# Altium PCB Relay_Controller_REV2.PcbDoc
Units mm, origin at the board's own origin, x right, y up, seen from the top; angles counter-clockwise.
Board outline 127.25 x 101.6 mm, 2 copper layers (Top Layer, Bottom Layer); 78 components, 52 nets, 291 pads, 93 vias.
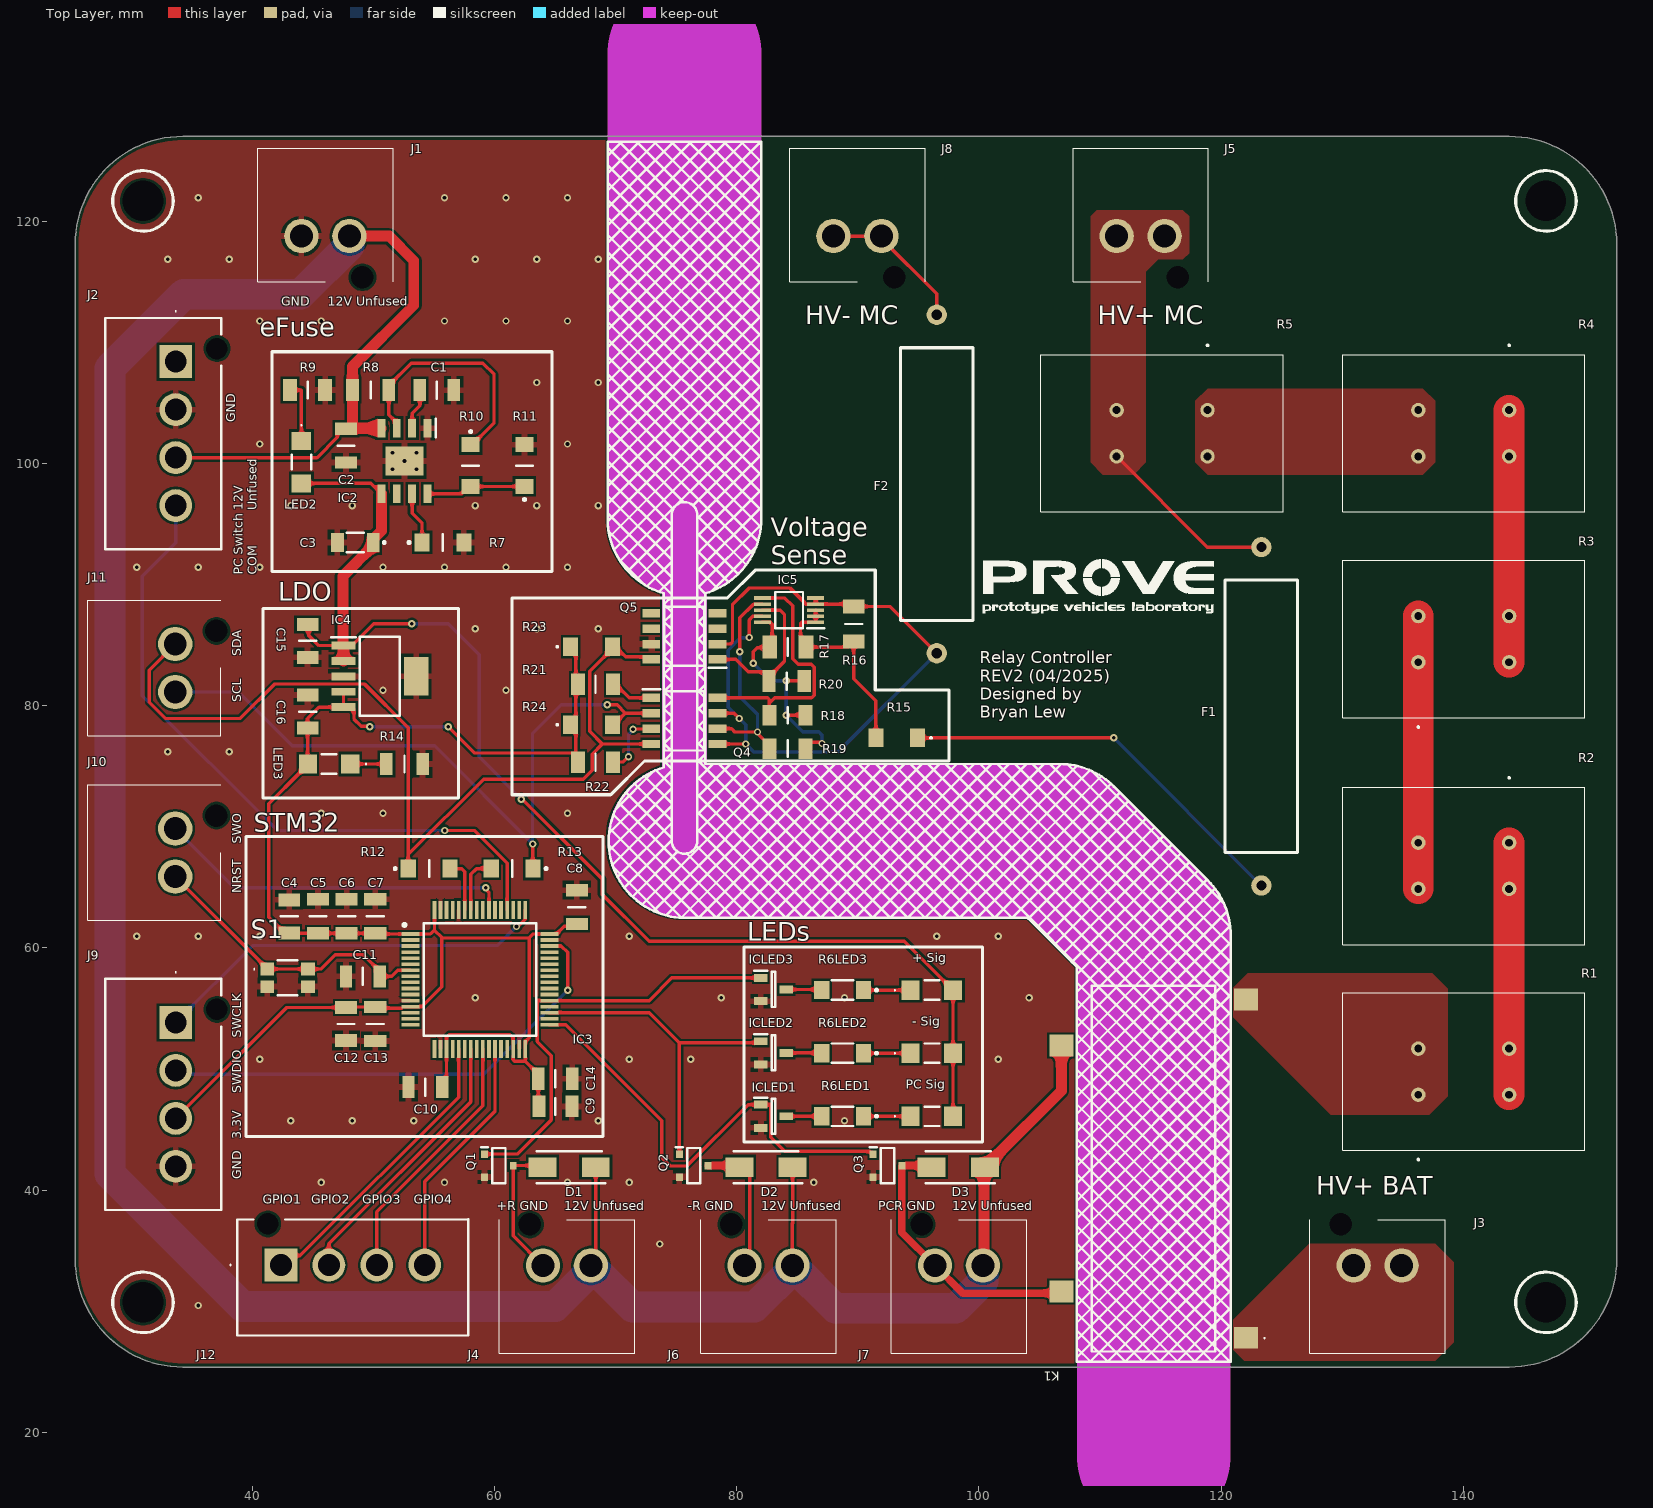
[diagram p0: Top Layer view]
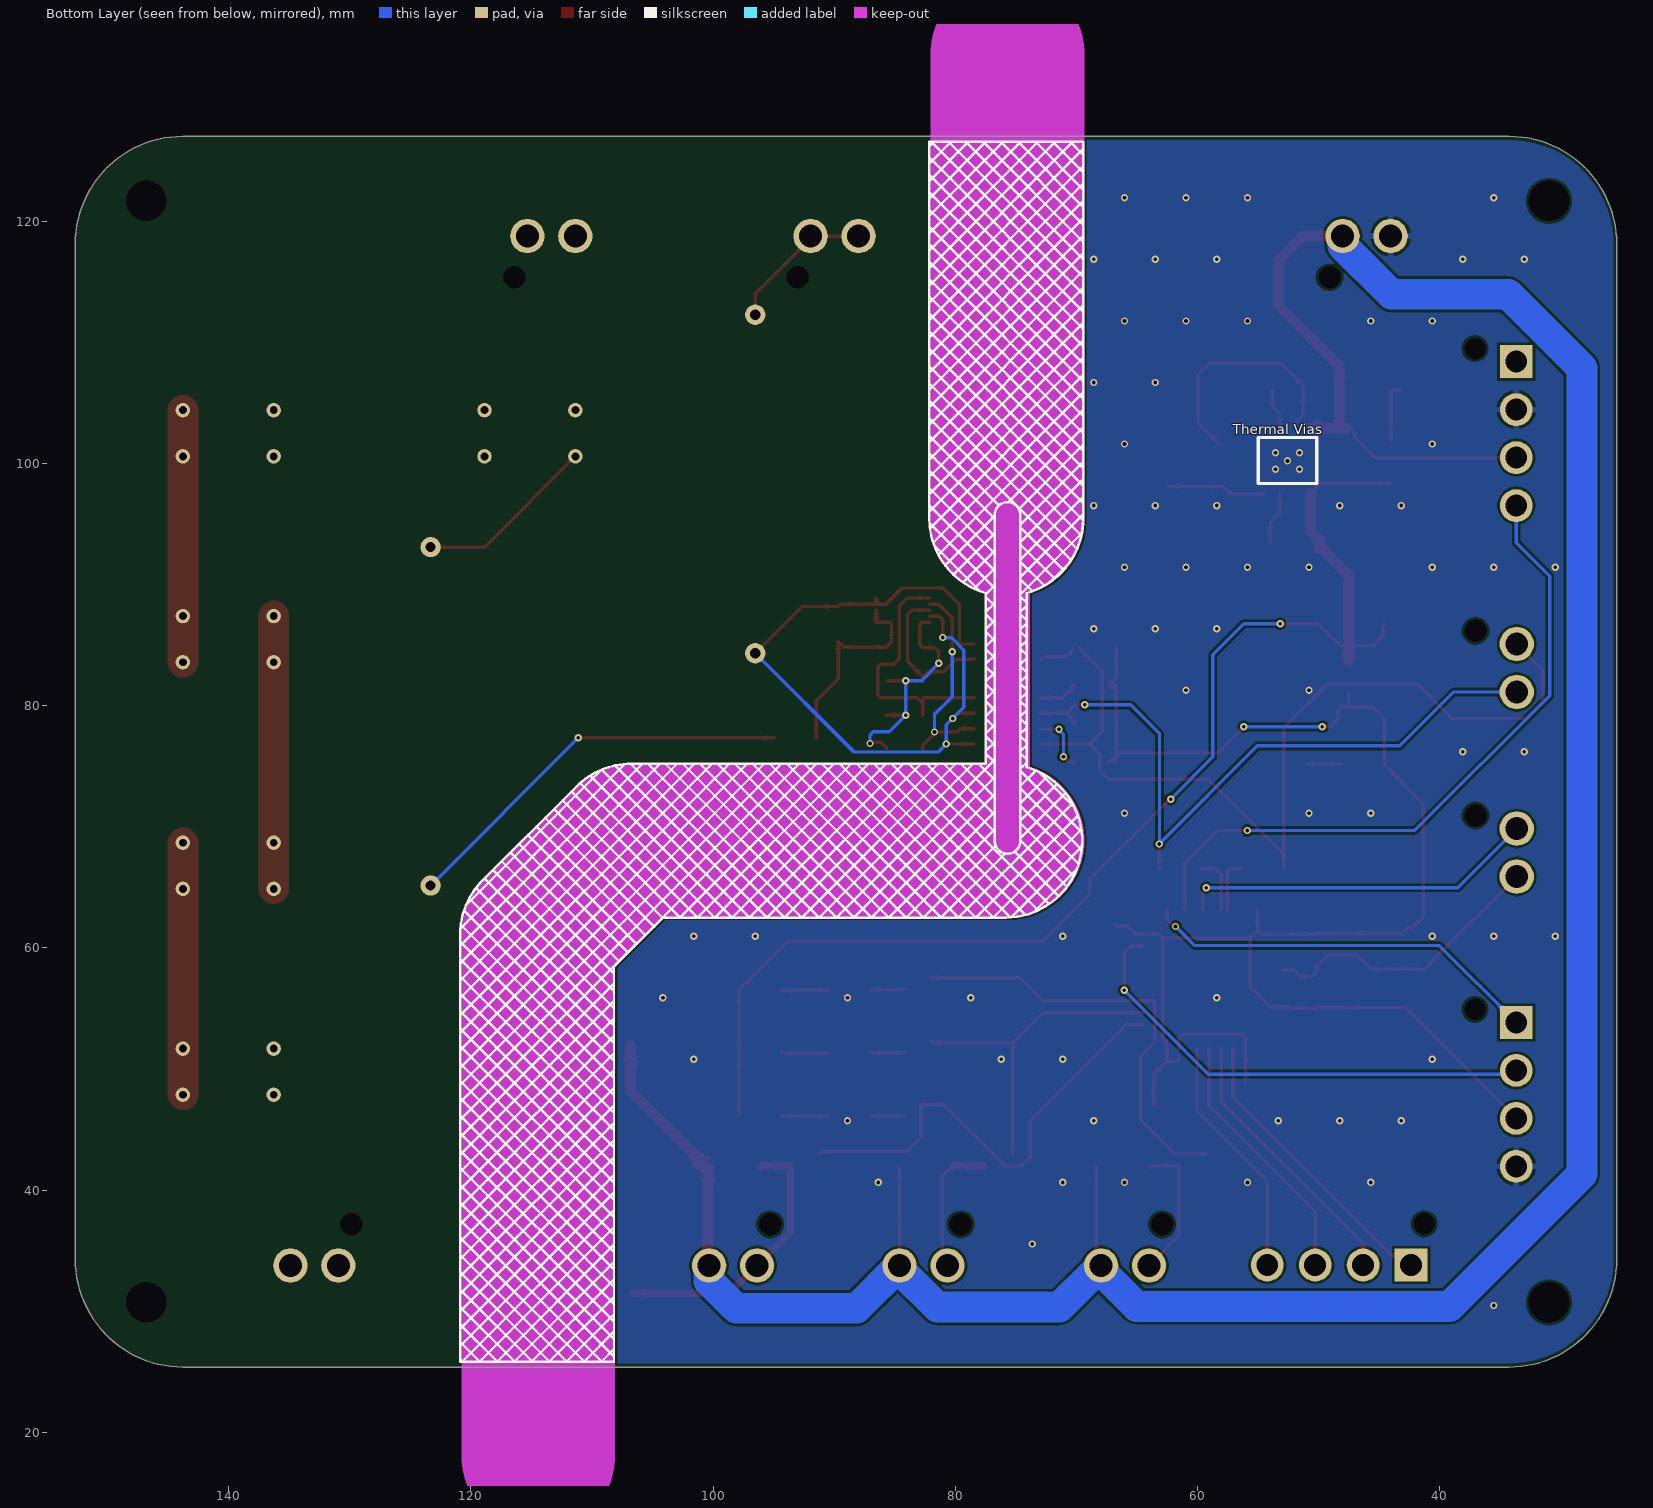
[diagram p1: Bottom Layer view, seen from below]
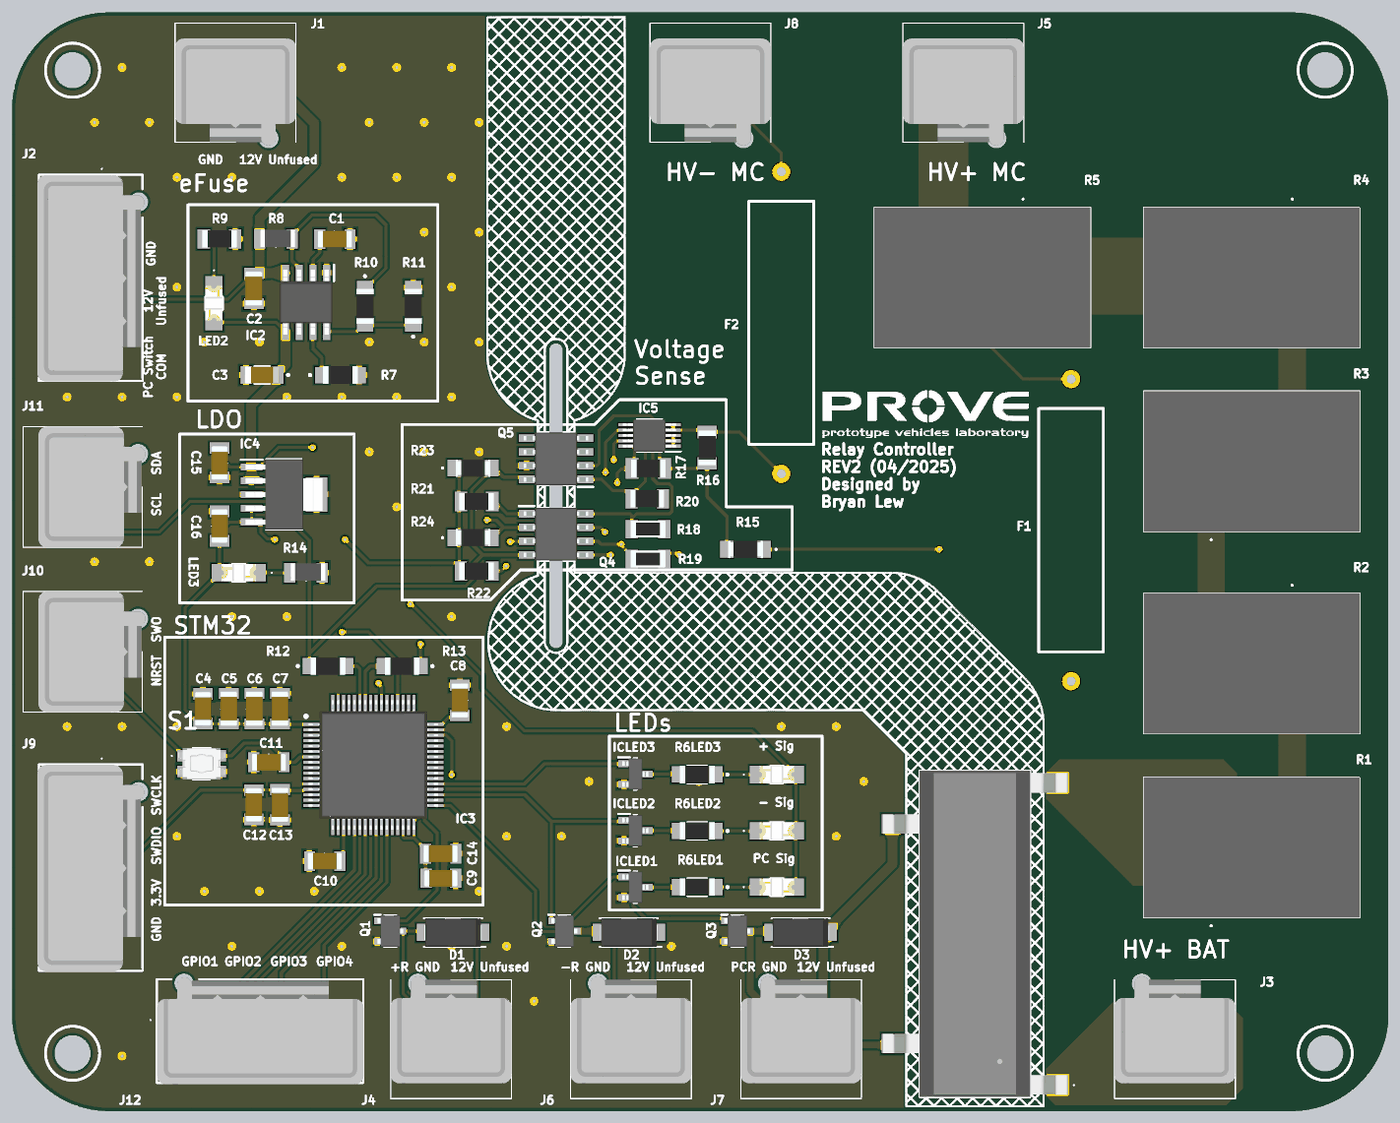
[diagram p2: 3D render of the assembled board from above, using the file's embedded part models]

## Layer stack, top to bottom
Top Solder: solder mask 0.0102, Solder Resist, Dk 3.5
Top Layer: signal copper 0.0356
Dielectric 1: dielectric 0.32, FR-4, Dk 4.8
Bottom Layer: signal copper 0.0356
Bottom Solder: solder mask 0.0102, Solder Resist, Dk 3.5

## Board outline
25.4,34.29 25.4,118.11 cw(c34.29,118.11) 34.29,127 143.764,127 cw(c143.764,118.11) 152.654,118.11 152.654,34.29 cw(c143.764,34.29) 143.764,25.4 34.29,25.4 cw(c34.29,34.29)
cut-out: 75.057,68.834 ccw(c75.692,68.834) 76.327,68.834 76.327,95.758 ccw(c75.692,95.758) 75.057,95.758

## Design rules (kind name [scope] priority, off if disabled: settings)
BoardOutlineClearance [All] p1: gap=0.3 ignorepadtopadclearanceinfootprint=FALSE except(0.4: Arc-SplitBarrior Arc-SplitContinuation Track-SplitBarrior Track-SplitContinuation SMDPad-SplitBarrior SMDPad-SplitContinuation THPad-SplitBarrior THPad-SplitContinuation Via-SplitBarrior Via-SplitContinuation Fill-SplitBarrior Fill-SplitContinuation Poly-SplitBarrior Poly-SplitContinuation Region-SplitBarrior Region-SplitContinuation Text-SplitBarrior Text-SplitContinuation)
Clearance "Clearance Different Nets" [All] p1: gap=0.2 ignorepadtopadclearanceinfootprint=FALSE except(0.089: Arc-Arc Arc-Track Arc-SMDPad Track-Track Track-SMDPad; 0.127: SMDPad-SMDPad SMDPad-Via THPad-Via Via-Via; 0.254: Arc-Via Arc-Text Track-Via Track-Text SMDPad-Text THPad-Text Via-Text Fill-Text Poly-Text Region-Text Text-Text; 0.5: THPad-THPad Via-Hole)
Clearance "Clearance Same Nets" [All] p2: gap=0.2 ignorepadtopadclearanceinfootprint=FALSE except(0.089: Arc-Arc Arc-Track Arc-SMDPad Track-Track Track-SMDPad SMDPad-SMDPad; 0.127: SMDPad-Via THPad-Via; 0.254: Arc-Via Arc-Text Track-Via Track-Text SMDPad-Text THPad-Text Via-Via Via-Text Fill-Text Poly-Text Region-Text Text-Text)
Clearance "Clearance Bottom Layer" [OnLayer('Bottom Layer')] p3: gap=0.203 ignorepadtopadclearanceinfootprint=TRUE except(0.254: Arc-Text Track-Text SMDPad-Text THPad-Text Via-Text Fill-Text Poly-Text Region-Text Text-Text)
Clearance "Clearance Top Layer" [OnLayer('Top Layer')] p4: gap=0.203 ignorepadtopadclearanceinfootprint=TRUE except(0.254: Arc-Text Track-Text SMDPad-Text THPad-Text Via-Text Fill-Text Poly-Text Region-Text Text-Text)
HoleSize [All] p1: absolutevalues=TRUE maxlimit=6.3 minlimit=0.2 maxpercent=80.000 minpercent=20.000
MinimumAnnularRing [All] p1: minimumring=0.13
MinimumSolderMaskSliver [All] p1: minsoldermaskwidth=0.1
PolygonConnect PolygonConnectPowerPads [InPolygonClass('PowerPolygons')] p1: connectstyle=Direct reliefconductorwidth=0.254 reliefentries=4 polygonreliefangle="90 Angle" airgapwidth=0.254
PolygonConnect PolygonConnect_1 [All] p2: thpad.connectstyle=Relief thpad.reliefconductorwidth=0.508 thpad.reliefentries=4 thpad.polygonreliefangle="90 Angle" thpad.airgapwidth=0.254 smdpad.connectstyle=Relief smdpad.reliefconductorwidth=0.508 smdpad.reliefentries=4 smdpad.polygonreliefangle="90 Angle" smdpad.airgapwidth=0.254 via.connectstyle=Direct via.reliefconductorwidth=0.508 via.reliefentries=4 via.polygonreliefangle="90 Angle" via.airgapwidth=0.254
RoutingCorners [All] p1: cornerstyle=Round minsetback=2.54 maxsetback=2.54
RoutingVias [All] p1: holewidth=0.5 width=1 viastyle="Through Hole" minholewidth=0.2 minwidth=0.35 maxholewidth=1 maxwidth=2
SilkToSilkClearance [All] p1: silktosilkclearance=0.1
SilkToSolderMaskClearance [IsPad] p1: minsilkscreentomaskgap=0.1 clearancetoexposedcopper=TRUE
SolderMaskExpansion [All] p1: expansion=0.102 istentingtop=FALSE
Width [All] p1: maxlimit=2.54 minlimit=0.089 preferedwidth=0.381
25 further rules are at their usual default settings.

## Classes and differential pairs
polygon class PowerPolygons: HV+_BAT_L01_P007 HV+_MC_UNFUSED_L01_P010 NETK1_2_L01_P009 NETR4_2_L01_P008
channel class LED_Driver: U_LED1 U_LED2 U_LED3
component class VoltageSense: F1 F2 IC5 Q4 Q5 R15 R16 R17 R18 R19 R20 R21 R22 R23 R24
component class U_LED3: "+ Sig" ICLED3 R6LED3
component class U_LED2: "- Sig" ICLED2 R6LED2
component class U_LED1: ICLED1 "PC Sig" R6LED1
component class STM32: C4 C5 C6 C7 C8 C9 C10 C11 C12 C13 C14 IC3 R12 R13 S1
component class "Relay Controller": D1 D2 D3 K1 Q1 Q2 Q3 R1 R2 R3 R4 R5
component class eFuse: "- Sig" C1 C2 C3 IC2 R7 R8 R9 R10 R11
component class Connectors: J1 J2 J3 J4 J5 J6 J7 J8 J9 J10 J11 J12
component class "12V to 3.3V LDO": "+ Sig" C15 C16 IC4 R14

## Components (designator, comment, footprint, x,y, rotation, side; value= is the part's Value field where it differs from the comment)
"+ Sig" "156120VS75000" 156120VS75000 96.114,56.515 r0 top (schematic designator LED1)
"- Sig" "156120VS75000" 156120VS75000 96.114,51.308 r0 top (schematic designator LED1)
C1 "2.2n" CAPC3216X94N 55.245,106.045 r0 top
C2 "100n" CAPC3216X94N 47.752,101.473 r270 top
C3 "100u" GRM31x 48.514,93.472 r180 top
C4 "4.7u" CAPC3216X180N 43.053,62.611 r90 top
C5 "100n" CAPC3216X94N 45.437,62.611 r90 top
C6 "100n" CAPC3216X94N 47.801,62.611 r90 top
C7 "100n" CAPC3216X94N 50.165,62.611 r90 top
C8 "100n" CAPC3216X94N 66.802,63.373 r90 top
C9 "100n" CAPC3216X94N 65.024,49.2 r0 top
C10 "100n" CAPC3216X94N 54.305,48.514 r180 top
C11 "100n" CAPC3216X94N 49.149,57.658 r180 top
C12 "1u" CAPC3216X180N 47.752,53.721 r270 top
C13 "100n" CAPC3216X94N 50.165,53.721 r270 top
C14 "4.7u" CAPC3216X180N 65.039,46.914 r0 top
C15 "10u" CAPC3216X180N 44.577,85.344 r270 top
C16 "10u" CAPC3216X180N 44.577,79.502 r90 top
D1 "RGF1M-E3_67A" DIOM5426X300N 66.167,41.907 r180 top
D2 "RGF1M-E3_67A" DIOM5426X300N 82.423,41.907 r180 top
D3 "RGF1M-E3_67A" DIOM5426X300N 98.298,41.907 r180 top
F1 "0ADKP0500-RE" 0ADKP0500-RE 123.317,79.121 r90 top
F2 "0ADKP0500-RE" 0ADKP0500-RE 96.52,98.298 r270 top
IC2 "TPS259630DDAR" SOIC127P600X170-9N 52.578,100.203 r270 top locked
IC3 "STM32F401RET7" QFP50P1200X1200X160-64N 58.801,57.404 r0 top
IC4 "TL1963A-33DCQT" SOT127P706X180-6N 50.546,82.423 r0 top
IC5 "LTC4151IMS-1#PBF" SOP50P490X110-10N 84.328,87.884 r180 top
ICLED1 "DMN61D8LQ-13" SOT96P240X110-3N 83.033,46.101 r0 top (schematic designator IC1)
ICLED2 "DMN61D8LQ-13" SOT96P240X110-3N 83.033,51.336 r0 top (schematic designator IC1)
ICLED3 "DMN61D8LQ-13" SOT96P240X110-3N 83.033,56.571 r0 top (schematic designator IC1)
J1 "1877285-2" 18772852 46.049,115.007 r180 top
J2 "1877285-4" 18772854 33.695,108.4 r270 top
J3 "1877285-2" 18772852 132.917,37.542 r0 top
J4 "1877285-2" 18772852 65.988,37.542 r0 top
J5 "1877285-2" 18772852 113.352,115.007 r180 top
J6 "1877285-2" 18772852 82.625,37.542 r0 top
J7 "1877285-2" 18772852 98.35,37.542 r0 top
J8 "1877285-2" 18772852 89.968,115.007 r180 top
J9 "1877285-4" 18772854 33.695,53.848 r270 top
J10 "1877285-2" 18772852 37.415,67.87 r270 top
J11 "1877285-2" 18772852 37.415,83.11 r270 top
J12 "1877285-4" 18772854 42.372,33.822 r0 top
K1 "KT12-1A-40L-SMD" KT121A40LSMD 114.427,41.783 r90 top
LED2 "156120VS75000" 156120VS75000 44.069,100.104 r270 top
LED3 "156120VS75000" 156120VS75000 46.355,75.184 r180 top
"PC Sig" "156120VS75000" 156120VS75000 96.114,46.101 r0 top (schematic designator LED1)
Q1 "" SOTFL95P240X88-3N 60.37,42.035 r0 top
Q2 "" SOTFL95P240X88-3N 76.454,42.035 r0 top
Q3 "" SOTFL95P240X88-3N 92.456,42.035 r0 top
Q4 "MOCD207M" SOIC127P594X363-8N 75.692,78.74 r0 top
Q5 "MOCD207M" SOIC127P594X363-8N 75.692,85.725 r180 top
R1 "TWW20J100E" TWW20J100E 136.271,47.879 r0 top
R2 "TWW20J100E" TWW20J100E 143.771,68.687 r180 top
R3 "TWW20J100E" TWW20J100E 136.271,83.586 r0 top
R4 "TWW20J100E" TWW20J100E 143.771,104.394 r180 top
R5 "TWW20J100E" TWW20J100E 118.872,104.394 r180 top
R6LED1 "ERA-8VEB4750V" ERA8KEB1004V 88.748,46.101 r180 top (schematic designator R6)
R6LED2 "ERA-8VEB4750V" ERA8KEB1004V 88.748,51.308 r180 top (schematic designator R6)
R6LED3 "ERA-8VEB4750V" ERA8KEB1004V 88.748,56.515 r180 top (schematic designator R6)
R7 "909" ERJ8ENF1000V 55.753,93.472 r0 top
R8 "464k" RESC3216X60N 49.784,106.055 r0 top
R9 "0.51k" RESC3216X65N 44.577,106.055 r0 top
R10 "33.2k" ERJ8ENF1000V 58.039,99.822 r270 top
R11 "47.5k" ERJ8ENF1000V 62.484,99.822 r90 top
R12 "33" ERJ8ENF1000V 54.61,66.548 r0 top
R13 "33" ERJ8ENF1000V 61.468,66.548 r180 top
R14 "CRCW120662R0FKTA" RESC3216X60N 52.578,75.184 r0 top
R15 "330k" ERJP08_(1206) 93.218,77.343 r180 top
R16 "100k" RESC3216X65N 89.662,86.741 r90 top
R17 "0.02" RESC3216X68N 84.226,84.836 r180 top
R18 "20k" RESC3216X70N 84.201,79.215 r180 top
R19 "20k" RESC3216X70N 84.201,76.454 r180 top
R20 "5.1k" RESC3116X65N 84.126,82.025 r180 top
R21 "0.51k" RESC3216X65N 68.346,81.77 r0 top
R22 "0.51k" RESC3216X65N 68.346,75.336 r0 top
R23 "10k" ERJP08_(1206) 68.021,84.861 r0 top
R24 "10k" ERJP08_(1206) 68.021,78.428 r0 top
S1 "TL1030AF350AQJ" TL1030AF350AQJ 42.926,57.531 r0 top

## Footprints (in the part's own frame and the unit in brackets; to place one, negate y for a bottom-side part, rotate by r counter-clockwise, add the part's x,y. Pads: shape width x height; smd on the part's side, far side on the other; paste and mask are expansions set on the pad)
0ADKP0500-RE [mil]
  round 66 hole 33: 1(-550,0) 2(550,0)
  Multi-Layer pour cut-out: -443,118 -443,-118 443,-118 443,118
  silkscreen extent -443,-118 443,118
156120VS75000 [mm]
  rect 1.5x1.6 smd: 1(-1.75,0) 2(1.75,0)
  silkscreen extent -3.1,-0.8 0.6,0.8, body extent -1.6,-0.8 1.6,0.8, height 1.2
18772852 [mm]
  round 2.835 hole 1.89: 1(-1.98,-3.76) 2(1.98,-3.76)
  round 0.93 hole 1.86 unplated: 3(-3.06,-0.36)
  silkscreen extent -5.58,-11 5.59,0, body extent -5.59,-9.58 5.59,0.3, height 11.91
18772854 [mm]
  rect 2.715x2.715 hole 1.81: 1(0,0)
  round 2.715 hole 1.81: 2(3.96,0) 3(7.92,0) 4(11.88,0)
  round 0.89 hole 1.78 unplated: 5(-1.08,3.4)
  silkscreen extent -4.2,-5.82 15.48,3.77, body extent -3.56,-5.96 15.53,3.93, height 11.86
CAPC3216X94N [mm]
  rect 1.02x1.82 smd: 1(-1.4,0) 2(1.4,0)
  silkscreen extent 0,-0.7 0,0.7, body extent -1.6,-0.8 1.6,0.8, height 0.94
CAPC3216X180N [mm]
  rect 1.07x1.78 smd: 1(-1.36,0) 2(1.36,0)
  silkscreen extent 0,-0.7 0,0.7, body extent -1.6,-0.8 1.6,0.8, height 1.8
DIOM5426X300N [mm]
  rect 2.3x1.6 smd: 1(-2.2,0) 2(2.2,0)
  silkscreen extent -3,-1.32 2.68,1.32, body extent -2.68,-1.32 2.68,1.32, height 3
ERA8KEB1004V [mm]
  rect 1.25x1.5 smd: 1(-1.725,0) 2(1.725,0)
  silkscreen extent -2.9,-0.8 0.9,0.8, body extent -1.6,-0.8 1.6,0.8, height 0.65
ERJ8ENF1000V [mm]
  rect 1.25x1.5 smd: 1(-1.725,0) 2(1.725,0)
  silkscreen extent -2.9,-0.67 0,0.67, body extent -1.6,-0.8 1.6,0.8, height 0.6
ERJP08_(1206) [mm]
  rect 1.25x1.55 smd: 1(-1.725,0) 2(1.725,0)
  silkscreen extent -2.88,-0.05 -2.78,0.05, body extent -1.6,-0.8 1.6,0.8, height 0.6
GRM31x [mm]
  rect 1.05x1.6 smd: 1(-1.475,0) 2(1.475,0)
  silkscreen extent -2.5,-0.8 0.7,0.8, body extent -1.6,-0.8 1.6,0.8, height 1
KT121A40LSMD [mm]
  rect 1.8x2 smd: 1(-13.97,-7.62) 2(13.97,-7.62) 3(10.15,7.62) 4(-10.15,7.62)
  silkscreen extent -15.1,-9.2 15.1,5.1, body extent -15.1,-8.5 15.1,8.5, height 8.71
QFP50P1200X1200X160-64N [mm]
  rect 1.475x0.3 smd: 1(-5.738,3.75) 2(-5.738,3.25) 3(-5.738,2.75) 4(-5.738,2.25) 5(-5.738,1.75) 6(-5.738,1.25) 7(-5.738,0.75) 8(-5.738,0.25) 9(-5.738,-0.25) 10(-5.738,-0.75) 11(-5.738,-1.25) 12(-5.738,-1.75) 13(-5.738,-2.25) 14(-5.738,-2.75) 15(-5.738,-3.25) 16(-5.738,-3.75) 33(5.738,-3.75) 34(5.738,-3.25) 35(5.738,-2.75) 36(5.738,-2.25) 37(5.738,-1.75) 38(5.738,-1.25) 39(5.738,-0.75) 40(5.738,-0.25) 41(5.738,0.25) 42(5.738,0.75) 43(5.738,1.25) 44(5.738,1.75) 45(5.738,2.25) 46(5.738,2.75) 47(5.738,3.25) 48(5.738,3.75)
  rect 0.3x1.475 smd: 17(-3.75,-5.738) 18(-3.25,-5.738) 19(-2.75,-5.738) 20(-2.25,-5.738) 21(-1.75,-5.738) 22(-1.25,-5.738) 23(-0.75,-5.738) 24(-0.25,-5.738) 25(0.25,-5.738) 26(0.75,-5.738) 27(1.25,-5.738) 28(1.75,-5.738) 29(2.25,-5.738) 30(2.75,-5.738) 31(3.25,-5.738) 32(3.75,-5.738) 49(3.75,5.738) 50(3.25,5.738) 51(2.75,5.738) 52(2.25,5.738) 53(1.75,5.738) 54(1.25,5.738) 55(0.75,5.738) 56(0.25,5.738) 57(-0.25,5.738) 58(-0.75,5.738) 59(-1.25,5.738) 60(-1.75,5.738) 61(-2.25,5.738) 62(-2.75,5.738) 63(-3.25,5.738) 64(-3.75,5.738)
  silkscreen extent -6.35,-4.65 4.65,4.65, body extent -6,-6 6,6, height 1.6
RESC3116X65N [mm]
  rect 1.1x1.8 smd: 1(-1.45,0) 2(1.45,0)
  silkscreen extent 0,-0.7 0,0.7, body extent -1.55,-0.8 1.55,0.8, height 0.65
RESC3216X60N [mm]
  rect 1.05x1.8 smd: 1(-1.5,0) 2(1.5,0)
  silkscreen extent 0,-0.7 0,0.7, body extent -1.42,-0.74 1.78,0.86, height 0.55
RESC3216X65N [mm]
  rect 1.15x1.8 smd: 1(-1.45,0) 2(1.45,0)
  silkscreen extent 0,-0.7 0,0.7, body extent -1.6,-0.8 1.6,0.8, height 0.65
RESC3216X68N [mm]
  rect 1.2x1.9 smd: 1(-1.5,0) 2(1.5,0)
  silkscreen extent 0,-0.73 0,0.73, body extent -1.6,-0.82 1.6,0.82, height 0.68
RESC3216X70N [mm]
  rect 1.15x1.7 smd: 1(-1.5,0) 2(1.5,0)
  silkscreen extent 0,-0.68 0,0.67, body extent -1.6,-0.8 1.6,0.8, height 0.6
SOIC127P594X363-8N [mm]
  rect 1.45x0.7 smd: 1(-2.725,1.905) 2(-2.725,0.635) 3(-2.725,-0.635) 4(-2.725,-1.905) 5(2.725,-1.905) 6(2.725,-0.635) 7(2.725,0.635) 8(2.725,1.905)
  silkscreen extent -3.45,-2.44 1.65,2.61, body extent -2.97,-2.44 2.97,2.44, height 3.63
SOIC127P600X170-9N [mm]
  rect 1.525x0.65 smd: 1(-2.712,1.905) 2(-2.712,0.635) 3(-2.712,-0.635) 4(-2.712,-1.905) 5(2.712,-1.905) 6(2.712,-0.635) 7(2.712,0.635) 8(2.712,1.905)
  rect 2.4x3.1 smd: 9(0,0)
  silkscreen extent -3.48,2.58 -1.95,2.58, body extent -3,-2.45 3,2.45, height 1.57
SOP50P490X110-10N [mm]
  rect 1.4x0.3 smd: 1(-2.2,1) 2(-2.2,0.5) 3(-2.2,0) 4(-2.2,-0.5) 5(-2.2,-1) 6(2.2,-1) 7(2.2,-0.5) 8(2.2,0) 9(2.2,0.5) 10(2.2,1)
  silkscreen extent -2.9,-1.5 1.15,1.5, body extent -2.46,-1.5 2.46,1.5, height 1.1
SOT96P240X110-3N [mm]
  rect 1.1x0.65 smd: 1(-1.05,0.96) 2(-1.05,-0.96) 3(1.05,0)
  silkscreen extent -1.6,-1.45 0.15,1.54, body extent -1.2,-1.45 1.2,1.45, height 1.1
SOT127P706X180-6N [mm]
  rect 2x0.65 smd: 1(-3,2.54) 2(-3,1.27) 3(-3,0) 4(-3,-1.27) 5(-3,-2.54)
  rect 2x3.2 smd: 6(3,0)
  silkscreen extent -4,-3.25 1.65,3.25, body extent -3.55,-3.25 3.55,3.25, height 1.66
SOTFL95P240X88-3N [mm]
  rect 0.575x0.62 smd: 1(-1.188,0.95) 2(-1.188,-0.95) 3(1.188,0)
  silkscreen extent -1.48,-1.45 0.55,1.51, body extent -1.2,-1.45 1.2,1.45, height 0.88
TL1030AF350AQJ [mm]
  rect 1.15x1.05 smd: 1(-1.675,0.725) 2(-1.675,-0.725) 3(1.675,0.725) 4(1.675,-0.725)
  silkscreen extent -2.8,-1.45 0.8,1.45, body extent -2.16,-1.45 2.16,1.45, height 1.71
TWW20J100E [mm]
  round 1.192 hole 0.65: 1(0,0) 2(7.5,0) 3(7.5,3.81) 4(0,3.81)
  silkscreen extent -6.25,-5.4 13.75,8.41, body extent -6.25,-4.59 13.75,8.4, height 46.1

## Part data
"+ Sig" "- Sig" LED2 LED3 "PC Sig": "LED", Manufacturer_Name="Wurth Elektronik", Mouser Part Number=710-156120VS75000, Datasheet Link=https://www.we-online.com/components/products/datasheet/156120VS75000.pdf, Height=1.3mm, Manufacturer_Part_Number=156120VS75000, Mouser Price/Stock=https://www.mouser.co.uk/ProductDetail/Wurth-Elektronik/156120VS75000?qs=2kOmHSv6VfQAUFg5BeuEfQ%3D%3D
C1: library part 1206YC222KAT2A, "Capacitor", Manufacturer_Name="Kyocera AVX", Mouser Part Number=581-1206YC222KAT2A, Manufacturer_Part_Number=1206YC222KAT2A, Mouser Price/Stock=https://www.mouser.co.uk/ProductDetail/AVX/1206YC222KAT2A?qs=CvOUr%252B7YgU7sng%252BvNa2zXQ%3D%3D
C2 C5 C6 C7 C8 C9 C10 C11 C13: library part 12065C104J4Z2A, "Capacitor", Manufacturer_Name="Kyocera AVX", Mouser Part Number=581-12065C104J4Z2A, Datasheet Link=https://spicat.kyocera-avx.com/product/mlcc/chartview/12065C104J4Z2A/DataSheet/X7R, Height=0.94mm, Manufacturer_Part_Number=12065C104J4Z2A, Mouser Price/Stock=https://www.mouser.com/Search/Refine.aspx?Keyword=581-12065C104J4Z2A
C3: library part GRM31CR60J107KEA8L, "Capacitor", Manufacturer_Name="Murata Electronics", Mouser Part Number=81-GRM31CR60J107KE8L, Datasheet Link=https://search.murata.co.jp/Ceramy/image/img/A01X/G101/ENG/GRM31CR60J107KEA8-01A.pdf, Height=1.25mm, Manufacturer_Part_Number=GRM31CR60J107KEA8L, Mouser Price/Stock=https://www.mouser.co.uk/ProductDetail/Murata-Electronics/GRM31CR60J107KEA8L?qs=pUKx8fyJudDzdyEEakAKPA%3D%3D
C4 C14: library part GMK316AB7475KLHT, "Capacitor", Manufacturer_Name="TAIYO YUDEN", Mouser Part Number=963-GMK316AB7475KLHT, Arrow Part Number=GMK316AB7475KLHT, Arrow Price/Stock=https://www.arrow.com/en/products/gmk316ab7475klht/taiyo-yuden?utm_currency=USD&region=nac, Datasheet Link=https://ds.yuden.co.jp/TYCOMPAS/ap/specSheet?pn=MMASG31LAB7475KTNA01, Height=1.8mm, Manufacturer_Part_Number=GMK316AB7475KLHT, Mouser Price/Stock=https://www.mouser.co.uk/ProductDetail/TAIYO-YUDEN/GMK316AB7475KLHT?qs=CNQs48zzdnoeKLJ9%2F6WNWQ%3D%3D
C12: library part HMK316B7105KLHT, "Capacitor", Manufacturer_Name="TAIYO YUDEN", Mouser Part Number=963-HMK316B7105KLHT, Arrow Part Number=HMK316B7105KLHT, Arrow Price/Stock=null?utm_currency=USD&region=nac, Datasheet Link=https://mouser.componentsearchengine.com/Datasheets/1/HMK316B7105KLHT.pdf, Height=1.8mm, Manufacturer_Part_Number=HMK316B7105KLHT, Mouser Price/Stock=https://www.mouser.co.uk/ProductDetail/TAIYO-YUDEN/HMK316B7105KLHT?qs=sz8xDBnIhcFmvpGfTAF0nQ%3D%3D
C15 C16: library part MLASU31LBB5106KTNA01, "Capacitor", Manufacturer_Name="TAIYO YUDEN", Datasheet Link=https://mm.digikey.com/Volume0/opasdata/d220001/medias/docus/5731/MLR01_e.pdf, Height=1.8mm, Manufacturer_Part_Number=MLASU31LBB5106KTNA01
D1 D2 D3: "Diode", Arrow Part Number=RGF1M-E3/67A, Manufacturer_Name=Vishay, Mouser Part Number=625-RGF1M-E3, Arrow Price/Stock=https://www.arrow.com/en/products/rgf1m-e367a/vishay?region=nac, Datasheet Link=https://www.vishay.com/docs/88697/rgf1.pdf, Height=3mm, Manufacturer_Part_Number=RGF1M-E3/67A, Mouser Price/Stock=https://www.mouser.co.uk/ProductDetail/Vishay-General-Semiconductor/RGF1M-E3-67A?qs=4xyK702%2F%252BQ1dl%252BTCdyIThg%3D%3D
F1 F2: "Fuse"
IC2: "Integrated Circuit", Manufacturer_Name="Texas Instruments", Mouser Part Number=595-TPS259630DDAR, Arrow Part Number=TPS259630DDAR, Arrow Price/Stock=https://www.arrow.com/en/products/tps259630ddar/texas-instruments, Datasheet Link=https://www.ti.com/lit/gpn/TPS2596, Height=1.7mm, Manufacturer_Part_Number=TPS259630DDAR, Mouser Price/Stock=https://www.mouser.co.uk/ProductDetail/Texas-Instruments/TPS259630DDAR?qs=T3oQrply3y%252BCA0rOFESTyA%3D%3D
IC3: "Integrated Circuit", Manufacturer_Name=STMicroelectronics, Mouser Part Number=511-STM32F401RET7, Arrow Part Number=STM32F401RET7, Arrow Price/Stock=https://www.arrow.com/en/products/stm32f401ret7/stmicroelectronics?utm_currency=USD&region=nac, Datasheet Link=https://www.arrow.com/en/products/stm32f401ret7/stmicroelectronics, Height=1.6mm, Manufacturer_Part_Number=STM32F401RET7, Mouser Price/Stock=https://www.mouser.co.uk/ProductDetail/STMicroelectronics/STM32F401RET7?qs=aVyJF2WnouSdX21y3k%2FIAA%3D%3D
IC4: "Integrated Circuit", Manufacturer_Name="Texas Instruments", Mouser Part Number=595-TL1963A-33DCQT, Arrow Part Number=TL1963A-33DCQT, Arrow Price/Stock=https://www.arrow.com/en/products/tl1963a-33dcqt/texas-instruments?utm_currency=USD&region=nac, Datasheet Link=http://www.ti.com/lit/gpn/TL1963A, Height=1.8mm, Manufacturer_Part_Number=TL1963A-33DCQT, Mouser Price/Stock=https://www.mouser.co.uk/ProductDetail/Texas-Instruments/TL1963A-33DCQT?qs=g0HfZ8wh75AyKD2vs560PQ%3D%3D
IC5: "Integrated Circuit", Manufacturer_Name="Analog Devices", Mouser Part Number=584-LTC4151IMS-1#PBF, Arrow Part Number=LTC4151IMS-1#PBF, Arrow Price/Stock=https://www.arrow.com/en/products/ltc4151ims-1pbf/linear-technology, Datasheet Link=https://www.analog.com/media/en/technical-documentation/data-sheets/4151ff.pdf, Height=1.1mm, Manufacturer_Part_Number=LTC4151IMS-1#PBF, Mouser Price/Stock=https://www.mouser.co.uk/ProductDetail/Analog-Devices/LTC4151IMS-1PBF?qs=hVkxg5c3xu8GkocOuUpsIw%3D%3D
ICLED1 ICLED2 ICLED3: "Integrated Circuit", Manufacturer_Name="Diodes Incorporated", Mouser Part Number=621-DMN61D8LQ-13, Arrow Part Number=DMN61D8LQ-13, Arrow Price/Stock=https://www.arrow.com/en/products/dmn61d8lq-13/diodes-incorporated?utm_currency=USD&region=nac, Datasheet Link=https://www.diodes.com//assets/Datasheets/DMN61D8LQ.pdf, Height=1.1mm, Manufacturer_Part_Number=DMN61D8LQ-13, Mouser Price/Stock=https://www.mouser.co.uk/ProductDetail/Diodes-Incorporated/DMN61D8LQ-13?qs=DBvH5xl4UymJgoulTjiNCg%3D%3D
J1 J3 J4 J5 J6 J7 J8 J10 J11: "Connector", Manufacturer_Name="TE Connectivity", Mouser Part Number=571-1877285-2, Arrow Part Number=1877285-2, Arrow Price/Stock=https://www.arrow.com/en/products/1877285-2/te-connectivity?region=europe, Datasheet Link=https://www.te.com/commerce/DocumentDelivery/DDEController?Action=srchrtrv&DocNm=7-1773458-5_ECONOMY_POWER_QRG&DocType=Data%20Sheet&DocLang=English&PartCntxt=1877285-2&DocFormat=pdf, Height=12mm, Manufacturer_Part_Number=1877285-2, Mouser Price/Stock=https://www.mouser.co.uk/ProductDetail/TE-Connectivity/1877285-2?qs=ka3zfMQDmFlAIZq5pDt5JA%3D%3D
J2 J9 J12: "Connector", Manufacturer_Name="TE Connectivity", Mouser Part Number=571-1877285-4, Arrow Part Number=1877285-4, Arrow Price/Stock=https://www.arrow.com/en/products/1877285-4/te-connectivity?region=nac, Datasheet Link=https://www.te.com/commerce/DocumentDelivery/DDEController?Action=srchrtrv&DocNm=1877285&DocType=Customer%20Drawing&DocLang=English&PartCntxt=1877285-4&DocFormat=pdf, Height=12.5mm, Manufacturer_Part_Number=1877285-4, Mouser Price/Stock=https://www.mouser.co.uk/ProductDetail/TE-Connectivity/1877285-4?qs=ka3zfMQDmFkZPBtotDIXvQ%3D%3D
K1: "Relay or Contactor", Manufacturer_Name=STANDEXMEDER, Mouser Part Number=876-KT12-1A-40L-SMD, Arrow Part Number=KT12-1A-40L-SMD, Arrow Price/Stock=https://www.arrow.com/en/products/kt12-1a-40l-smd/standex-meder-electronics, Datasheet Link=https://standexelectronics.com/resources/technical-library/technical-papers/datasheet-kt-series-reed-relay/, Height=8.7mm, Manufacturer_Part_Number=KT12-1A-40L-SMD
Q1 Q2 Q3: library part SSM3K357R,LF, "MOSFET (N-Channel)", Manufacturer_Name=Toshiba, Mouser Part Number=757-SSM3K357RLF, Arrow Part Number=SSM3K357R,LF, Arrow Price/Stock=https://www.arrow.com/en/products/ssm3k357rlf/toshiba?utm_currency=USD&region=nac, Datasheet Link=https://toshiba.semicon-storage.com/info/docget.jsp?did=59207&prodName=SSM3K357R, Height=0.88mm, Manufacturer_Part_Number=SSM3K357R,LF, Mouser Price/Stock=https://www.mouser.co.uk/ProductDetail/Toshiba/SSM3K357RLF?qs=F5EMLAvA7ICLn4Y138U4bA%3D%3D
Q4 Q5: "Transistor", Manufacturer_Name=onsemi, Mouser Part Number=512-MOCD207M, Arrow Part Number=MOCD207M, Arrow Price/Stock=https://www.arrow.com/en/products/mocd207m/on-semiconductor?region=europe, Datasheet Link=https://www.onsemi.com/pub/Collateral/MOCD217M-D.PDF, Height=3.63mm, Manufacturer_Part_Number=MOCD207M, Mouser Price/Stock=https://www.mouser.co.uk/ProductDetail/onsemi-Fairchild/MOCD207M?qs=Z0HAwyWrFkxA8A7IbmLQiA%3D%3D
R1 R2 R3 R4 R5: "Resistor", Manufacturer_Name=Ohmite, Mouser Part Number=588-TWW20J100E, Datasheet Link=https://www.mouser.in/datasheet/2/303/res_tww_twm-1228653.pdf, Height=46mm, Manufacturer_Part_Number=TWW20J100E, Mouser Price/Stock=https://www.mouser.co.uk/ProductDetail/Ohmite/TWW20J100E?qs=PzGy0jfpSMsE3rbWfgqD2A%3D%3D
R6LED1 R6LED2 R6LED3: "Resistor", Manufacturer_Name=Panasonic, Mouser Part Number=667-ERA-8VEB4750V, Datasheet Link=https://industrial.panasonic.com/cdbs/www-data/pdf/RDM0000/RDM0000C331.pdf, Height=0.65mm, Manufacturer_Part_Number=ERA-8VEB4750V, Mouser Price/Stock=https://www.mouser.co.uk/ProductDetail/Panasonic/ERA-8VEB4750V?qs=By6Nw2ByBD36LBLC0KPpEw%3D%3D
R7: library part ERJ-8ENF9090V, "Resistor", Manufacturer_Name=Panasonic, Mouser Part Number=667-ERJ-8ENF9090V, Datasheet Link=https://industrial.panasonic.com/cdbs/www-data/pdf/RDA0000/AOA0000C86.pdf, Height=0.7mm, Manufacturer_Part_Number=ERJ-8ENF9090V, Mouser Price/Stock=https://www.mouser.co.uk/ProductDetail/Panasonic/ERJ-8ENF9090V?qs=Ow%252BOiPmaljFp7qjHXHnn0Q%3D%3D
R8: library part CRCW1206464KFKEA, "Resistor", Manufacturer_Name=Vishay, Mouser Part Number=71-CRCW1206-464K-E3, Datasheet Link=http://componentsearchengine.com/Datasheets/2/CRCW1206464KFKEA.pdf, Height=0.6mm, Manufacturer_Part_Number=CRCW1206464KFKEA, Mouser Price/Stock=https://www.mouser.co.uk/ProductDetail/Vishay-Dale/CRCW1206464KFKEA?qs=9sFvXT%252Bien0sktzQDV2mCw%3D%3D
R9 R21 R22: library part KTR18EZPJ511, "Resistor", Manufacturer_Name="ROHM Semiconductor", Mouser Part Number=755-KTR18EZPJ511, Datasheet Link=http://rohmfs.rohm.com/en/products/databook/datasheet/passive/resistor/chip_resistor/ktr.pdf, Height=0.65mm, Manufacturer_Part_Number=KTR18EZPJ511, Mouser Price/Stock=https://www.mouser.co.uk/ProductDetail/ROHM-Semiconductor/KTR18EZPJ511?qs=DyUWGjl%252BcVvm7MQRIM2yRQ%3D%3D
R10: library part ERJ-8ENF3322V, "Resistor", Manufacturer_Name=Panasonic, Mouser Part Number=667-ERJ-8ENF3322V, Arrow Part Number=ERJ-8ENF3322V, Arrow Price/Stock=https://www.arrow.com/en/products/erj-8enf3322v/panasonic, Datasheet Link=https://industrial.panasonic.com/cdbs/www-data/pdf/RDA0000/AOA0000C86.pdf, Height=0.7mm, Manufacturer_Part_Number=ERJ-8ENF3322V, Mouser Price/Stock=https://www.mouser.co.uk/ProductDetail/Panasonic/ERJ-8ENF3322V?qs=8%252BG0TiN%2FgVoP4ztf7NoJ7g%3D%3D
R11: library part ERJ-8ENF4752V, "Resistor", Manufacturer_Name=Panasonic, Mouser Part Number=667-ERJ-8ENF4752V, Arrow Part Number=ERJ-8ENF4752V, Arrow Price/Stock=https://www.arrow.com/en/products/erj-8enf4752v/panasonic, Datasheet Link=https://industrial.panasonic.com/cdbs/www-data/pdf/RDA0000/AOA0000C86.pdf, Height=0.7mm, Manufacturer_Part_Number=ERJ-8ENF4752V, Mouser Price/Stock=https://www.mouser.com/Search/Refine.aspx?Keyword=667-ERJ-8ENF4752V
R12 R13: library part ERJ-8ENF33R0V, "Resistor", Manufacturer_Name=Panasonic, Mouser Part Number=667-ERJ-8ENF33R0V, Datasheet Link=https://industrial.panasonic.com/cdbs/www-data/pdf/RDA0000/AOA0000C86.pdf, Height=0.7mm, Manufacturer_Part_Number=ERJ-8ENF33R0V, Mouser Price/Stock=https://www.mouser.co.uk/ProductDetail/Panasonic/ERJ-8ENF33R0V?qs=8%252BG0TiN%2FgVpb1yH%2F8k6uQg%3D%3D
R14: "Resistor", Manufacturer_Name=Vishay, Mouser Part Number=71-CRCW1206-62, Height=0.6mm, Manufacturer_Part_Number=CRCW120662R0FKTA, Mouser Price/Stock=https://www.mouser.co.uk/ProductDetail/Vishay-Dale/CRCW120662R0FKTA?qs=ZNjI1vpoWDOW7%2FSNU3Zcgg%3D%3D
R15: library part ERJ-P08D3303V, "Resistor", Manufacturer_Name=Panasonic, Datasheet Link=http://industrial.panasonic.com/cdbs/www-data/pdf/RDO0000/AOA0000C331.pdf, Height=0.7mm, Manufacturer_Part_Number=ERJ-P08D3303V
R16: library part MCA12060C1003FP500, "Resistor", Manufacturer_Name=Vishay, Mouser Part Number=594-MCA12060C1003FP5, Datasheet Link=https://componentsearchengine.com/Datasheets/1/MCA12060C1003FP500.pdf, Height=0.65mm, Manufacturer_Part_Number=MCA12060C1003FP500, Mouser Price/Stock=https://www.mouser.com/Search/Refine.aspx?Keyword=594-MCA12060C1003FP5
R17: library part PCS1206DR0200ET, "Resistor", Manufacturer_Name=Ohmite, Mouser Part Number=588-PCS1206DR0200ET, Datasheet Link=https://componentsearchengine.com/Datasheets/1/PCS1206DR0200ET.pdf, Height=0.684mm, Manufacturer_Part_Number=PCS1206DR0200ET, Mouser Price/Stock=https://www.mouser.co.uk/ProductDetail/Ohmite/PCS1206DR0200ET?qs=Zz7%252BYVVL6bHe1REzh6xp%2Fw%3D%3D
R18 R19: library part ERA-8APB203V, "Resistor", Manufacturer_Name=Panasonic, Mouser Part Number=667-ERA-8APB203V, Datasheet Link=https://industrial.panasonic.com/cdbs/www-data/pdf/RDM0000/AOA0000C307.pdf, Height=0.7mm, Manufacturer_Part_Number=ERA-8APB203V, Mouser Price/Stock=https://www.mouser.co.uk/ProductDetail/Panasonic/ERA-8APB203V?qs=PgLP5AltfozIbJaoHBTq0Q%3D%3D
R20: library part CRCW12065K10FKEAHP, "Resistor", Manufacturer_Name=Vishay, Mouser Part Number=71-CRCW12065K10FKEAH, Arrow Part Number=CRCW12065K10FKEAHP, Arrow Price/Stock=https://www.arrow.com/en/products/crcw12065k10fkeahp/vishay?region=nac, Datasheet Link=http://componentsearchengine.com/Datasheets/1/CRCW12065K10FKEAHP.pdf, Height=0.65mm, Manufacturer_Part_Number=CRCW12065K10FKEAHP, Mouser Price/Stock=https://www.mouser.co.uk/ProductDetail/Vishay-Dale/CRCW12065K10FKEAHP?qs=YmE2lSBYOPkBMGQxuoTowQ%3D%3D
R23 R24: library part ERJ-P08D1002V, "Resistor", Manufacturer_Name=Panasonic, Mouser Part Number=667-ERJ-P08D1002V, Arrow Part Number=ERJ-P08D1002V, Arrow Price/Stock=https://www.arrow.com/en/products/erj-p08d1002v/panasonic, Datasheet Link=http://industrial.panasonic.com/cdbs/www-data/pdf/RDO0000/AOA0000C331.pdf, Height=0.7mm, Manufacturer_Part_Number=ERJ-P08D1002V, Mouser Price/Stock=https://www.mouser.co.uk/ProductDetail/Panasonic/ERJ-P08D1002V?qs=iIVTEDlrHA2EA%252BOcRk4tPQ%3D%3D
S1: "Switch", Manufacturer_Name=E-Switch, Mouser Part Number=612-TL1030AF350AQJ, Datasheet Link=https://configured-product-images.s3.amazonaws.com/2D/specs/TL1030AF350AQJ.pdf, Height=1.95mm, Manufacturer_Part_Number=TL1030AF350AQJ, Mouser Price/Stock=https://www.mouser.co.uk/ProductDetail/E-Switch/TL1030AF350AQJ?qs=VVKQmw408U%2FgalG8VZqjEg%3D%3D

## Free pads (board coordinates)
  round 1.524 hole 3.35 unplated: 1(30.988,30.734) 1(30.988,121.666) 1(146.812,30.734) 1(146.812,121.666)

## Via types
v1: diameter 0.61, hole 0.3, Top Layer to Bottom Layer, 93 vias

## Nets (pads, with @x,y where several pads share a name; then routed paths per layer and width w, separated by ;. In a path a pad name is that pad's centre, name@x,y a point inside that pad or via, vN(x,y) a via of type N, cw(c..) or ccw(c..) an arc to the next point about the centre after c; other vN are vias at no path point)
3.3V: C4.1 C5.1 C6.1 C7.1 C8.1 C9.1 C10.1 C12.1 C13.1 C14.1 C16.1 IC3.1 IC3.13 IC3.19 IC3.30 IC3.32 IC3.48 IC3.64 IC4.4 IC4.5 J9.3 LED3.2 R21.1 R22.1 R23.1 R24.1 | length 140.4
  Top Layer w0.279: J9.3 42.848,55.081 C12.1 47.792,55.121 C13.1 50.253,55.033 52.354,55.033 52.465,55.144 53.053,55.144 IC3.13 54.011,55.154 55.644,56.787 55.644,60.824 ; IC4.4 IC4.5 ; v1(49.702,78.252) 49.641,78.313 48.992,78.313 48.406,78.898 48.406,79.698 48.221,79.883 IC4.5 ; IC3.64 55.051,61.477 ; C10.1@56.01,48.768 56.051,48.809 IC3.19 56.051,52.629 56.273,52.851 61.272,52.851 61.551,52.571 IC3.30 ; v1(56.185,78.257) 58.345,76.097 66.461,76.097 R22.1@66.728,75.83 ; IC3.30@61.551,51.078 61.551,50.755 61.659,50.647 62.551,50.647 ; IC3.32@62.551,52.253 62.551,50.647 ; IC3.32@62.561,52.264 62.881,52.584 62.881,60.824 ; C14.1@63.486,46.939 63.479,46.946 63.624,47.091 C9.1 ; C9.1@63.599,49.2 63.599,49.6 62.551,50.647 ; R23.1@66.728,84.836 66.728,82.344 67.328,81.744 R21.1@67,81.416 ; C8.1 66.628,61.799 65.771,61.799 65.137,61.164 64.549,61.164 IC3.48 63.212,61.154 62.881,60.824 ; R22.1 66.896,75.661 R22.1@66.728,75.83 ; R21.1@66.896,81.416 R21.1 66.728,81.601 R22.1@66.728,75.83 ; R22.1@67,75.639 R22.1@67.328,75.311 ; IC4.5 45.517,79.883 44.577,78.943 C16.1 44.577,75.212 LED3.2 43.995,74.574 43.995,74.523 41.377,71.905 41.377,62.535 42.265,61.646 42.658,61.646 43.093,61.211 C5.1 C6.1 C7.1 50.222,61.154 IC3.1 54.728,61.154 55.051,61.477 ; 55.051,61.477 55.644,60.884 55.644,60.824 ; 55.644,60.824 62.881,60.824
  Bottom Layer w0.279: v1(49.702,78.252) 49.705,78.255 56.182,78.255 v1(56.185,78.257)
12V: "+ Sig.2" "- Sig.2" "PC Sig.2" C3.1 C15.1 IC2.5 IC4.1 IC4.2 LED2.2 | length 106
  Top Layer w0.279: LED2.2 49.81,98.354 IC2.5 ; C15.1 44.653,86.704 44.653,85.827 45.517,84.963 IC4.1@47.498,84.963 ; IC4.1 48.221,84.963 50.024,86.766 v1(53.188,86.766) ; v1(62.23,72.288) 62.306,72.288 68.885,65.71 68.885,64.44 72.771,60.554 93.825,60.554 97.203,57.175 97.253,57.175 97.864,56.565 97.864,56.515 97.864,51.308 97.864,46.101
  Top Layer w0.889: IC4.1@47.498,84.963 47.498,90.706 49.989,93.197 C3.1 49.989,93.747 50.673,94.431 IC2.5 ; IC4.2 IC4.1
  Bottom Layer w0.279: v1(53.188,86.766) 56.185,86.766 58.75,84.201 58.75,75.768 v1(62.23,72.288)
"12V Unfused": C2.1 D1.1 D2.1 D3.1 IC2.4 J1.1 J2.3 J4.2 J6.2 J7.2 K1.3 R8.1 | length 254
  Top Layer w0.279: J2.3 45.359,100.48 47.025,102.146 47.025,102.503 47.395,102.873 C2.1 ; IC2.4@50.631,102.873 50.652,102.894 IC2.4 ; J4.2 68.367,34.181 D1.1 ; J6.2 84.605,37.262 84.623,37.28 D2.1
  Top Layer w0.889: C2.1 47.773,102.894 C2.1@48.173,102.894 ; J1.1 51.311,118.767 53.34,116.738 53.34,113.055 48.284,107.999 R8.1 48.284,103.005 C2.1@48.173,102.894 ; C2.1@48.152,102.873 C2.1@48.173,102.894 ; IC2.4@50.652,102.894 C2.1@48.173,102.894 ; J7.2 100.414,33.866 D3.1@100.414,41.907 ; D3.1 100.848,41.907 101.203,42.262 101.203,42.612 106.807,48.216 K1.3
  Bottom Layer w2.54: J1.1 48.026,118.764 48.026,117.978 44.017,113.969 34.375,113.969 28.27,107.863 28.27,41.326 39.192,30.404 65.024,30.404 67.912,33.291 67.912,33.726 J4.2 67.972,33.782 68.618,33.137 71.401,30.353 81.497,30.353 84.602,33.458 84.602,33.775 J6.2@84.605,33.778 ; J6.2@84.608,33.779 88.136,30.251 98.094,30.251 100.327,32.484 100.327,33.779 J7.2
"+ Relay GND": D1.2 J4.1 Q1.3 | length 11.7
  Top Layer w0.279: D1.2 63.839,42.035 Q1.3 61.558,36.232 J4.1
"+ Signal": IC3.37 ICLED3.1 Q1.1 | length 36.3
  Top Layer w0.279: Q1.1 61.885,42.985 64.694,45.794 64.694,51.105 63.525,52.273 63.525,55.654 IC3.37 72.774,55.654 74.651,57.531 ICLED3.1
"- Relay GND": D2.2 J6.1 Q2.3 | length 11.4
  Top Layer w0.279: D2.2 81.072,41.246 81.072,34.209 J6.1
  Top Layer w0.61: Q2.3 77.647,42.029 80.1,42.029 D2.2
"- Signal": IC3.35 ICLED2.1 Q2.1 | length 27.7
  Top Layer w0.279: IC3.35 72.784,54.654 75.266,52.172 ; Q2.1 75.266,52.172 ; ICLED2.1 81.859,52.172 75.266,52.172
EN/UVLO: IC2.3 R8.2 R10.1 | length 20.3
  Top Layer w0.279: IC2.3 51.943,103.353 51.284,104.011 R8.2 51.284,106.43 53.134,108.28 59.043,108.28 59.969,107.354 59.969,103.352 58.164,101.547 R10.1
GND: C1.2 C2.2 C3.2 C4.2 C5.2 C6.2 C7.2 C8.2 C9.2 C10.2 C11.2 C12.2 C13.2 C14.2 C15.2 C16.2 IC2.1 IC2.9 IC3.12 IC3.18 IC3.31 IC3.47 IC3.60 IC3.63 IC4.3 IC4.6 ICLED1.2 ICLED2.2 ICLED3.2 J1.2 J2.2 J9.4 Q1.2 Q2.2 Q3.2 Q5.7 R7.2 R9.2 R11.2 R14.2 S1.2 S1.4
  other v1: 35.56,30.48 73.66,35.56 45.72,40.64 55.88,40.64 66.04,40.64 71.12,40.64 86.36,40.64 43.18,45.72 48.26,45.72 53.34,45.72 68.58,45.72 88.9,45.72 40.64,50.8 71.12,50.8 76.2,50.8 101.6,50.8 58.42,55.88 78.74,55.88 88.9,55.88 104.14,55.88 30.48,60.96 35.56,60.96 40.64,60.96 71.12,60.96 96.52,60.96 101.6,60.96 45.72,71.12 50.8,71.12 66.04,71.12 33.02,76.2 38.1,76.2 50.8,81.28 60.96,81.28 58.42,86.36 63.5,86.36 68.58,86.36 30.48,91.44 35.56,91.44 40.64,91.44 50.8,91.44 55.88,91.44 60.96,91.44 66.04,91.44 43.18,96.52 48.26,96.52 58.42,96.52 63.5,96.52 68.58,96.52 51.587,99.517 53.569,99.517 52.578,100.203 51.587,100.889 53.569,100.889 40.64,101.6 66.04,101.6 63.5,106.68 68.58,106.68 40.64,111.76 45.72,111.76 55.88,111.76 60.96,111.76 66.04,111.76 33.02,116.84 38.1,116.84 58.42,116.84 63.5,116.84 68.58,116.84 35.56,121.92 55.88,121.92 60.96,121.92 66.04,121.92
"HV+ BAT": J3.1 J3.2 K1.1
"HV+ MC Unfused": F1.2 J5.1 J5.2 R5.2 R5.3 | length 15
  Top Layer w0.279: R5.3 118.865,93.091 F1.2
"HV+ ÷ 8": IC5.1 IC5.2 IC5.3 R15.2 R16.1 R17.1 | length 17.3
  Top Layer w0.279: IC5.3 IC5.2 IC5.1 85.376,86.884 85.268,86.776 85.268,85.294 R17.1 88.738,84.836 88.758,84.856 89.227,84.856 R16.1 89.662,82.222 91.493,80.391 R15.2
HV-: F2.2 IC5.4 IC5.5 IC5.9 Q4.5 Q4.7 Q5.2 R16.2 | length 61.5
  Top Layer w0.279: Q4.5 v1(80.747,76.835) ; Q4.7 79.781,79.375 v1(80.213,78.943) ; Q5.2 79.491,85.09 79.654,85.254 79.654,88.316 81.051,89.713 84.404,89.713 85.599,88.518 85.599,88.492 85.707,88.384 IC5.4 ; v1(81.026,85.623) 81.026,87.071 81.328,87.374 82.118,87.374 IC5.9 ; IC5.5 IC5.4 ; F2.2 92.657,88.191 R16.2 89.469,88.384 IC5.4
  Bottom Layer w0.279: v1(81.026,85.623) 81.001,85.598 80.315,85.598 79.299,84.582 79.299,79.858 v1(80.213,78.943) 80.747,78.41 v1(80.747,76.835) 81.407,76.175 88.367,76.175 F2.2
"HV- MC Unfused": F2.1 J8.1 J8.2 | length 12.4
  Top Layer w0.279: J8.2 J8.1 91.948,118.566 96.52,113.994 F2.1
NetC1_1: C1.1 IC2.2 | length 3.4
  Top Layer w0.279: IC2.2 53.213,104.14 53.845,104.772 C1.1
NetF1_1: F1.1 R15.1 | length 33.4
  Top Layer w0.279: R15.1 v1(111.125,77.343)
  Bottom Layer w0.279: v1(111.125,77.343) F1.1
NetIC1_U_LED1_3: ICLED1.3 R6LED1.2 | length 2.9
  Top Layer w0.279: ICLED1.3 R6LED1.2
NetIC1_U_LED2_3: ICLED2.3 R6LED2.2 | length 3
  Top Layer w0.279: ICLED2.3 86.995,51.336 R6LED2.2
NetIC1_U_LED3_3: ICLED3.3 R6LED3.2 | length 3
  Top Layer w0.279: ICLED3.3 86.967,56.571 R6LED3.2
NetIC2_7: IC2.7 R7.1 | length 4.4
  Top Layer w0.279: IC2.7 53.213,95.887 54.028,95.072 R7.1
NetIC3_21: IC3.21 J12.1 | length 24.4
  Top Layer w0.279: J12.1 43.162,34.612 43.985,34.612 57.051,47.678 IC3.21
NetIC3_23: IC3.23 J12.2 | length 22.7
  Top Layer w0.279: J12.2 46.332,35.562 58.051,47.281 IC3.23
NetIC3_25: IC3.25 J12.3 | length 21.5
  Top Layer w0.279: J12.3 50.292,38.202 59.051,46.961 IC3.25
NetIC3_27: IC3.27 J12.4 | length 20.2
  Top Layer w0.279: J12.4 54.252,40.716 60.051,46.515 IC3.27
NetIC3_58: IC3.58 R13.2 | length 4.8
  Top Layer w0.279: IC3.58 58.051,66.077 58.522,66.548 R13.2
NetIC3_59: IC3.59 R12.2 | length 4.5
  Top Layer w0.279: R12.2 57.302,66.548 57.551,66.299 IC3.59
NetIC5_10: IC5.10 R17.2 R18.1 R19.1 R20.1 | length 20.6
  Top Layer w0.279: v1(81.356,83.49) 81.356,84.436 81.707,84.787 82.677,84.787 R17.2 82.931,85.041 82.931,86.71 82.767,86.874 82.138,86.874 IC5.10 ; v1(84.099,79.223) 85.693,79.223 R18.1 ; v1(84.099,82.067) 84.125,82.042 85.559,82.042 R20.1 ; R19.1 85.701,76.552 86.136,76.987 86.85,76.987 86.959,76.878 v1(87.046,76.878)
  Bottom Layer w0.279: v1(81.356,83.49) 82.779,82.067 v1(84.099,82.067) v1@84.099,79.217 ; v1(84.099,79.223) 85.471,77.851 86.766,77.851 87.046,77.572 v1(87.046,76.878)
NetK1_2: K1.2 R1.1 R1.4
NetLED1_U_LED1_1: "PC Sig.1" R6LED1.1 | length 3.9
  Top Layer w0.279: R6LED1.1 94.364,46.101
NetLED1_U_LED2_1: "- Sig.1" R6LED2.1 | length 3.9
  Top Layer w0.279: R6LED2.1 94.364,51.308
NetLED1_U_LED3_1: "+ Sig.1" R6LED3.1 | length 3.9
  Top Layer w0.279: R6LED3.1 94.364,56.515
NetLED2_1: LED2.1 R9.1 | length 5.1
  Top Layer w0.279: R9.1 44.069,106.055 LED2.1
NetLED3_1: LED3.1 R14.1 | length 3
  Top Layer w0.279: LED3.1 R14.1
NetQ4_1: Q4.1 R21.2 | length 3.3
  Top Layer w0.279: R21.2@70.228,81.744 70.228,81.565 71.148,80.645 Q4.1
NetQ4_3: Q4.3 R22.2 | length 5.1
  Top Layer w0.279: R22.2@70.228,75.26 70.228,75.348 70.232,75.351 70.627,75.351 v1(71.069,75.794) ; v1(71.442,78.049) 71.47,78.077 72.939,78.077 Q4.3
  Bottom Layer w0.279: v1(71.069,75.794) 71.069,77.59 71.442,77.963 v1(71.442,78.049)
NetR1_2: R1.2 R1.3 R2.1 R2.4 | length 20.8
  Top Layer w2.54: R1.2 R2.1
NetR2_2: R2.2 R2.3 R3.1 R3.4 | length 22.5
  Top Layer w2.54: R2.3 R3.4
NetR3_2: R3.2 R3.3 R4.1 R4.4 | length 20.8
  Top Layer w2.54: R3.2 R4.1
NetR4_2: R4.2 R4.3 R5.1 R5.4
NRST: C11.1 IC3.7 J10.2 S1.1 S1.3 | length 24.3
  Top Layer w0.279: J10.2 40.816,58.729 40.816,58.641 41.201,58.256 S1.1 S1.3 45.683,58.256 46.863,59.436 49.171,59.436 50.179,58.428 50.179,58.028 C11.1 51.537,57.658 52.033,58.154 IC3.7
OVLO: IC2.8 R10.2 R11.1 | length 8.3
  Top Layer w0.279: IC2.8 57.308,97.491 57.914,98.097 R10.2 R11.1
"PC Signal": IC3.33 ICLED1.1 Q3.1 | length 38.7
  Top Layer w0.279: IC3.33 65.904,53.654 73.812,45.745 73.812,42.693 74.505,42 75.9,42 80.961,47.061 ICLED1.1 82.804,47.061 82.804,44.374 83.978,43.2 91.012,43.2 91.057,43.155 91.12,43.155 91.268,43.007 Q3.1
"PC Switch COM": IC3.52 J2.4 | length 56.5
  Top Layer w0.279: v1(55.905,69.698) 58.346,69.698 61.051,66.992 IC3.52
  Bottom Layer w0.279: J2.4 33.695,93.457 30.926,90.688 30.926,80.834 42.062,69.698 v1(55.905,69.698)
"Precharge Relay GND": D3.2 J7.1 K1.4 Q3.3 | length 23
  Top Layer w0.61: D3.2 95.975,42.029 93.649,42.029 Q3.3 93.644,36.508 J7.1 98.656,31.496 K1.4@106.579,31.496
SCL: J11.2 Q4.2 R13.1 R24.2 | length 58.2
  Top Layer w0.279: v1(63.17,68.58) 63.17,66.571 R13.1 ; v1(69.317,80.061) 70.133,80.061 70.819,79.375 ; R24.2@70.178,78.403 70.178,78.734 70.819,79.375 ; Q4.2 70.819,79.375
  Bottom Layer w0.279: J11.2 38.86,81.13 43.307,76.683 55.067,76.683 v1(63.17,68.58) 63.144,68.605 63.144,77.673 65.532,80.061 v1(69.317,80.061)
"SCL (Non-Isolated)": IC5.6 Q4.8 R18.2 | length 21.1
  Top Layer w0.279: Q4.8 82.549,80.645 82.701,80.493 82.701,80.186 ; IC5.6 83.988,88.884 84.633,88.24 84.633,83.857 85.076,83.414 86.157,83.414 86.411,83.16 86.411,80.874 86.182,80.645 83.16,80.645 82.701,80.186 ; R18.2 82.701,80.186
SDA: J11.1 Q4.4 Q5.8 R12.1 R23.2 | length 80.1
  Top Layer w0.279: J11.1 31.496,82.931 31.496,80.264 32.817,78.943 39.014,78.943 41.859,81.788 49.278,81.788 52.885,78.181 R12.1 52.885,67.719 59.106,73.939 67.351,73.939 68.072,74.66 68.072,75.997 68.91,76.835 ; R23.2 69.746,84.711 67.869,82.834 67.869,77.876 68.91,76.835 ; R23.2@70.253,84.611 70.834,84.03 72.757,84.03 Q5.8 ; Q4.4 68.91,76.835
SDAI: IC5.7 Q4.6 R19.2 | length 17.6
  Top Layer w0.279: Q4.6 79.578,78.105 79.858,77.826 v1(81.725,77.826) ; v1(80.264,84.457) 80.264,87.247 81.391,88.374 82.118,88.374 IC5.7 ; v1@81.712,77.826 81.781,77.756 81.781,77.649 82.701,76.729 R19.2
  Bottom Layer w0.279: v1(80.264,84.457) 80.264,80.747 80.682,80.329 81.72,79.291 81.72,77.831 v1(81.725,77.826)
SDAO: IC5.8 Q5.1 R20.2 | length 12.9
  Top Layer w0.279: Q5.1 79.92,83.82 80.954,82.786 82.266,82.786 82.676,82.375 83.947,83.646 83.947,87.528 83.591,87.884 IC5.8 ; R20.2 R20.2@82.676,82.372
SWCLK: IC3.49 J9.1 | length 33.2
  Top Layer w0.279: v1(61.824,61.773) 61.885,61.834 62.008,61.834 62.541,62.367 62.541,63.132 IC3.49
  Bottom Layer w0.279: J9.1 40.045,60.198 60.249,60.198 v1(61.824,61.773)
SWDIO: IC3.46 J9.2 | length 40.2
  Top Layer w0.279: IC3.46 65.532,60.154 66.047,59.639 v1(66.047,56.496)
  Bottom Layer w0.279: J9.2 34.002,49.581 59.131,49.581 v1(66.047,56.496)
SWO: IC3.55 J10.1 | length 29.6
  Top Layer w0.279: v1(59.279,64.968) 59.279,64.881 59.551,64.609 IC3.55
  Bottom Layer w0.279: J10.1 38.537,64.968 v1(59.279,64.968)
pads on no net: IC2.6 IC3.2 IC3.3 IC3.4 IC3.5 IC3.6 IC3.8 IC3.9 IC3.10 IC3.11 IC3.14 IC3.15 IC3.16 IC3.17 IC3.20 IC3.22 IC3.24 IC3.26 IC3.28 IC3.29 IC3.34 IC3.36 IC3.38 IC3.39 IC3.40 IC3.41 IC3.42 IC3.43 IC3.44 IC3.45 IC3.50 IC3.51 IC3.53 IC3.54 IC3.56 IC3.57 IC3.61 IC3.62 J1.3 J2.1 J2.5 J3.3 J4.3 J5.3 J6.3 J7.3 J8.3 J9.5 J10.3 J11.3 J12.5 Q5.3 Q5.4 Q5.5 Q5.6

## Polygon pours and split planes (outlines as drawn)
GND on Top Layer "GND_L01_P006" (solid, pour order 6): 25.455,34.535 25.455,25.645 34.345,25.645 114.609,25.645 114.609,60.57 106.354,68.825 75.239,68.825 75.239,127.245 25.455,127.245
"HV+ MC Unfused" on Top Layer "HV+_MC_UNFUSED_L01_P010" (solid, pour order 10): 109.22,120.396 109.22,100.076 110.236,99.06 112.776,99.06 113.792,100.076 113.792,115.824 114.808,116.84 116.84,116.84 117.348,117.348 117.348,120.396 116.84,120.904 109.728,120.904
NetK1_2 on Top Layer "NETK1_2_L01_P009" (solid, pour order 9): 120.98,56.718 120.98,54.28 129.032,46.228 137.16,46.228 138.684,47.752 138.684,56.642 137.414,57.912 122.174,57.912
NetR4_2 on Top Layer "NETR4_2_L01_P008" (solid, pour order 8): 117.856,105.156 117.856,100.076 118.872,99.06 136.652,99.06 137.668,100.076 137.668,105.156 136.652,106.172 118.872,106.172
"HV+ BAT" on Top Layer "HV+_BAT_L01_P007" (solid, pour order 7): 120.98,29.286 120.98,26.848 121.92,25.908 137.668,25.908 139.192,27.432 139.192,34.036 137.668,35.56 127.254,35.56
no net on Top Overlay "NONET_L01_P004" (hatched 45Degree grid 1.016 track 0.203): 75.696,62.484 cw(c75.768,68.817) 74,74.9 74,89.274 cw(c75.769,95.45) 69.346,95.352 69.346,133.833 cw(c75.696,133.833) 82.046,133.833 82.046,95.352 cw(c75.627,95.444) 77.4,89.274 77.4,75.184 106.658,75.184 cw(c106.659,68.834) 111.15,73.324 111.149,73.324 118.921,65.552 118.921,65.553 cw(c114.431,61.062) 120.781,61.062 120.781,18.009 cw(c114.431,18.009) 108.081,18.009 108.081,58.431 104.028,62.484
GND on Bottom Layer "GND_L02_P001" (solid, pour order 1): 25.4,34.29 25.4,25.4 34.29,25.4 114.554,25.4 114.554,60.325 106.299,68.58 75.184,68.58 75.184,127 25.4,127
no net on Bottom Overlay "NONET_L01_P004" (hatched 45Degree grid 1.016 track 0.203): 75.796,62.507 cw(c75.868,68.841) 74.1,74.923 74.1,89.298 cw(c75.869,95.473) 69.446,95.375 69.446,133.856 cw(c75.796,133.856) 82.147,133.856 82.147,95.375 cw(c75.727,95.468) 77.5,89.298 77.5,75.208 106.759,75.208 cw(c106.759,68.858) 111.25,73.347 111.249,73.348 119.022,65.575 119.021,65.576 cw(c114.531,61.085) 120.882,61.085 120.882,18.032 cw(c114.531,18.032) 108.181,18.032 108.181,58.455 104.128,62.507

## Keep-outs
Keep-Out Layer:
  lines w3.683: 75.692,68.859 75.692,95.377
  lines w12.7: 75.692,68.859 106.655,68.859 114.427,61.087 114.427,18.034 ; 75.692,95.377 75.692,133.858

## Silkscreen, mask and mechanical layers (free items; w line width, h text height)
Top Overlay:
  drawing of 67 lines, arcs and shapes, not listed
  text "GND" at 42.418,113.03 h0.76
  text "12V Unfused" at 46.228,113.03 h0.76
  text "HV- MC" at 85.651,111.506 h1.52
  text "HV+ MC" at 109.804,111.506 h1.52
  text "eFuse" at 40.64,110.49 h1.52
  text "GND" at 38.608,103.378 h0.76 r90
  text "12V / Unfused" at 40.386,96.14 h0.76 r90
  text "Voltage / Sense" at 82.804,91.694 h1.52
  text "PC Switch / COM" at 40.386,90.805 h0.76 r90
  text "LDO" at 42.164,88.646 h1.52
  text "SDA" at 39.116,84.074 h0.76 r90
  text "SCL" at 39.116,80.264 h0.76 r90
  text "Relay Controller / REV2 (04/2025) / Designed by / Bryan Lew" at 100.076,78.994 h1
  text "STM32" at 40.132,69.596 h1.52
  text "SWO" at 39.116,68.58 h0.76 r90
  text "NRST" at 39.116,64.516 h0.76 r90
  text "LEDs" at 80.874,60.579 h1.52
  text "SWCLK" at 39.116,52.578 h0.76 r90
  text "SWDIO" at 39.116,48.006 h0.76 r90
  text "3.3V" at 39.116,44.196 h0.76 r90
  text "GND" at 39.116,40.894 h0.76 r90
  text "HV+ BAT" at 127.839,39.624 h1.52
  text "GPIO1" at 40.894,38.862 h0.76
  text "GPIO2" at 44.873,38.862 h0.76
  text "GPIO3" at 49.107,38.862 h0.76
  text "GPIO4" at 53.34,38.862 h0.76
  text "+R GND" at 60.198,38.354 h0.76
  text "12V Unfused" at 65.786,38.354 h0.76
  text "-R GND" at 75.946,38.354 h0.76
  text "12V Unfused" at 82.042,38.354 h0.76
  text "PCR GND" at 91.694,38.354 h0.76
  text "12V Unfused" at 97.79,38.354 h0.76
Bottom Overlay:
  lines w0.254: 50.165,98.349 54.991,98.349 54.991,102.133 50.165,102.133 50.165,98.349
  text "Thermal Vias" at 57.11,102.387 h0.8
Mechanical 1:
  lines w0.254: 25.4,34.29 ccw(c34.29,34.29) 34.29,25.4 143.764,25.4 ccw(c143.764,34.29) 152.654,34.29 152.654,118.11 ccw(c143.764,118.11) 143.764,127 34.29,127 ccw(c34.29,118.11) 25.4,118.11 25.4,34.29
  lines w1.27: 75.692,68.834 75.692,95.758